# Altium PCB V_2.PcbDoc
Units mm, origin at the board's own origin, x right, y up, seen from the top; angles counter-clockwise.
Board outline 152.4 x 101.6 mm, 2 copper layers (Top Layer, Bottom Layer); 10 components, 0 nets, 82 pads, 64 vias.
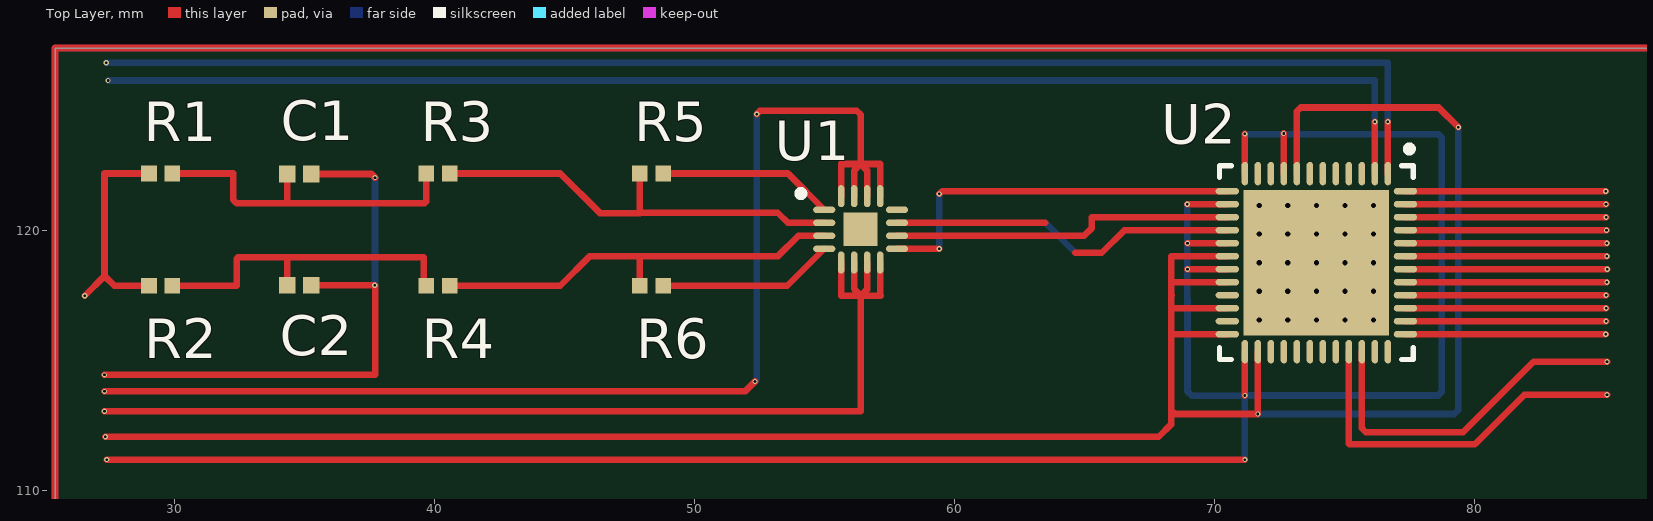
[diagram p0: Top Layer view]
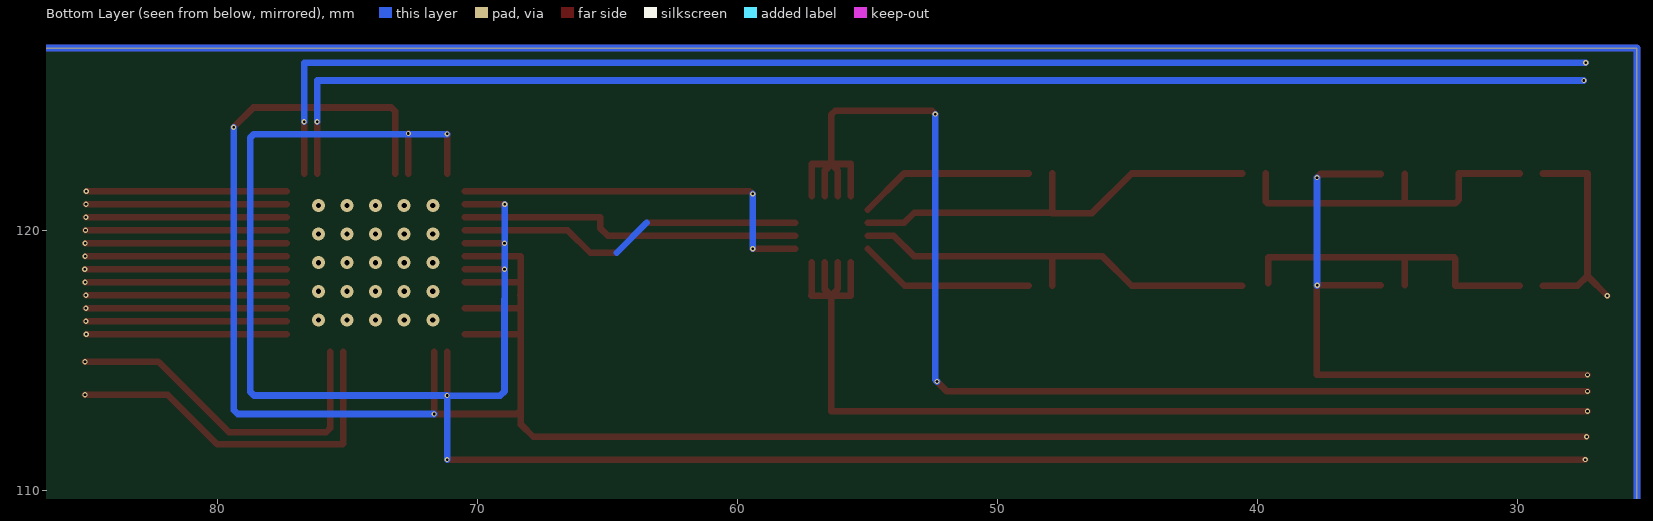
[diagram p1: Bottom Layer view, seen from below]

## Layer stack, top to bottom
Top Solder: solder mask 0.0102, Solder Resist, Dk 3.5
Top Layer: signal copper 0.0356
Dielectric 1: dielectric 0.32, FR-4, Dk 4.8
Bottom Layer: signal copper 0.0356
Bottom Solder: solder mask 0.0102, Solder Resist, Dk 3.5

## Board outline
25.4,25.4 177.8,25.4 177.8,127 25.4,127

## Design rules (kind name [scope] priority, off if disabled: settings)
Clearance [All] p1: gap=0.254 ignorepadtopadclearanceinfootprint=FALSE
PolygonConnect [All] p1: connectstyle=Relief reliefconductorwidth=0.254 reliefentries=4 polygonreliefangle="90 Angle" airgapwidth=0.254
RoutingVias [All] p1: holewidth=0.711 width=1.27 viastyle="Through Hole" minholewidth=0.711 minwidth=1.27 maxholewidth=0.711 maxwidth=1.27
SolderMaskExpansion [All] p1: expansion=0.102 istentingtop=FALSE
Width [All] p1: maxlimit=0.254 minlimit=0.254 preferedwidth=0.254
30 further rules are at their usual default settings.

## Components (designator, comment, footprint, x,y, rotation, side; value= is the part's Value field where it differs from the comment)
C1 "Comment" C 34.798,122.154 r0 top
C2 "Comment" C 34.798,117.876 r0 top
R1 "Comment" R 29.464,122.174 r0 top
R2 "Comment" R 29.464,117.856 r0 top
R3 "Comment" R 40.132,122.174 r0 top
R4 "Comment" R 40.132,117.856 r0 top
R5 "Comment" R 48.346,122.174 r0 top
R6 "Comment" R 48.346,117.856 r0 top
U1 "Comment" ADA 56.385,120.027 r0 top
U2 "Comment" ADC 73.914,118.745 r270 top

## Footprints (in the part's own frame and the unit in brackets; to place one, negate y for a bottom-side part, rotate by r counter-clockwise, add the part's x,y. Pads: shape width x height; smd on the part's side, far side on the other; paste and mask are expansions set on the pad)
ADA [mm] "QFN, 16-Leads, Body 3,00x2,75mm, Pitch 0,50mm, Thermal Pad 1,30x1,30mm, IPC Medium Density"
  oval 0.85x0.25 smd: 1(-1.4,0.75) 2(-1.4,0.25) 3(-1.4,-0.25) 4(-1.4,-0.75) 9(1.4,-0.75) 10(1.4,-0.25) 11(1.4,0.25) 12(1.4,0.75)
  oval 0.25x0.85 smd: 5(-0.75,-1.275) 6(-0.25,-1.275) 7(0.25,-1.275) 8(0.75,-1.275) 13(0.75,1.275) 14(0.25,1.275) 15(-0.25,1.275) 16(-0.75,1.275)
  rect 1.3x1.3 smd: 17(0,0)
  silkscreen extent -2.42,1.25 -2.17,1.5, body extent -1.5,-1.37 1.5,1.38, height 1
ADC [mm]
  oval 0.9x0.25 smd: 1(-3.425,2.75) 2(-3.425,2.25) 3(-3.425,1.75) 4(-3.425,1.25) 5(-3.425,0.75) 6(-3.425,0.25) 7(-3.425,-0.25) 8(-3.425,-0.75) 9(-3.425,-1.25) 10(-3.425,-1.75) 11(-3.425,-2.25) 12(-3.425,-2.75) 25(3.425,-2.75) 26(3.425,-2.25) 27(3.425,-1.75) 28(3.425,-1.25) 29(3.425,-0.75) 30(3.425,-0.25) 31(3.425,0.25) 32(3.425,0.75) 33(3.425,1.25) 34(3.425,1.75) 35(3.425,2.25) 36(3.425,2.75)
  oval 0.25x0.9 smd: 13(-2.75,-3.425) 14(-2.25,-3.425) 15(-1.75,-3.425) 16(-1.25,-3.425) 17(-0.75,-3.425) 18(-0.25,-3.425) 19(0.25,-3.425) 20(0.75,-3.425) 21(1.25,-3.425) 22(1.75,-3.425) 23(2.25,-3.425) 24(2.75,-3.425) 37(2.75,3.425) 38(2.25,3.425) 39(1.75,3.425) 40(1.25,3.425) 41(0.75,3.425) 42(0.25,3.425) 43(-0.25,3.425) 44(-0.75,3.425) 45(-1.25,3.425) 46(-1.75,3.425) 47(-2.25,3.425) 48(-2.75,3.425)
  rect 5.6x5.6 smd: 49(0,0)
  silkscreen extent -4.5,-3.73 3.73,3.72, body extent -3.57,-3.58 3.58,3.57, height 1
C [mm] "Chip Capacitor, 2-Leads, Body 1,00x0,50mm, IPC Medium Density"
  rect 0.64x0.64 smd: 1(-0.46,0) 2(0.46,0)
  body extent -0.55,-0.3 0.55,0.3, height 0.6
R [mm]
  rect 0.6x0.6 smd: 1(-0.45,0) 2(0.45,0)
  body extent -0.55,-0.3 0.55,0.3, height 0.6

## Via types
v1: diameter 0.2, hole 0.1, Top Layer to Bottom Layer, 39 vias
v2: diameter 0.5, hole 0.2, Top Layer to Bottom Layer, 25 vias

## Nets (pads, with @x,y where several pads share a name; then routed paths per layer and width w, separated by ;. In a path a pad name is that pad's centre, name@x,y a point inside that pad or via, vN(x,y) a via of type N, cw(c..) or ccw(c..) an arc to the next point about the centre after c; other vN are vias at no path point)
pads on no net: C1.1 C1.2 C2.1 C2.2 R1.1 R1.2 R2.1 R2.2 R3.1 R3.2 R4.1 R4.2 R5.1 R5.2 R6.1 R6.2 U1.1 U1.2 U1.3 U1.4 U1.5 U1.6 U1.7 U1.8 U1.9 U1.10 U1.11 U1.12 U1.13 U1.14 U1.15 U1.16 U1.17 U2.1 U2.2 U2.3 U2.4 U2.5 U2.6 U2.7 U2.8 U2.9 U2.10 U2.11 U2.12 U2.13 U2.14 U2.15 U2.16 U2.17 U2.18 U2.19 U2.20 U2.21 U2.22 U2.23 U2.24 U2.25 U2.26 U2.27 U2.28 U2.29 U2.30 U2.31 U2.32 U2.33 U2.34 U2.35 U2.36 U2.37 U2.38 U2.39 U2.40 U2.41 U2.42 U2.43 U2.44 U2.45 U2.46 U2.47 U2.48 U2.49
copper on no net: | length 640.3
  Top Layer w0.254: v1(26.543,117.475) 27.305,118.237 ; v1(27.305,113.03) 56.007,113.03 56.388,113.03 ; v1(27.305,113.792) 51.943,113.792 v1(52.324,114.173) ; v1(27.305,114.427) 37.719,114.427 37.719,117.856 v1(37.699,117.876) 35.258,117.876 ; v1(27.338,112.047) 67.851,112.047 68.326,112.522 68.326,113.072 ; v1(27.391,111.169) v1(71.164,111.169) ; 29.014,117.856 27.686,117.856 27.305,118.237 ; 29.014,122.174 27.305,122.174 27.305,118.237 ; 29.914,117.856 32.385,117.856 32.385,118.903 ; 29.914,122.174 32.258,122.174 32.258,121.158 32.385,121.031 34.417,121.031 ; 32.433,118.951 34.338,118.951 ; 34.338,117.876 34.338,118.951 ; 34.338,122.154 34.338,121.11 34.417,121.031 ; 35.258,122.154 37.572,122.154 v1(37.709,122.017) ; 39.576,117.962 39.576,118.951 34.338,118.951 ; 39.624,121.031 34.417,121.031 ; 39.682,121.089 39.682,122.174 ; 40.582,117.856 44.831,117.856 45.974,118.999 47.879,118.999 ; 40.582,122.174 44.831,122.174 46.355,120.65 47.879,120.65 47.896,120.667 ; 47.896,117.856 47.896,118.982 47.879,118.999 ; 47.896,122.174 47.896,120.667 ; 48.796,117.856 53.564,117.856 54.985,119.277 ; 48.796,122.174 53.588,122.174 54.985,120.777 ; v1(52.387,124.46) 52.514,124.587 56.239,124.587 56.388,124.438 56.388,122.54 ; 54.985,119.777 53.991,119.777 53.213,118.999 47.879,118.999 ; 54.985,120.277 53.586,120.277 53.196,120.667 47.896,120.667 ; 55.635,118.752 55.635,117.484 55.644,117.475 57.15,117.475 57.135,117.49 57.135,118.752 ; 55.635,121.302 55.635,122.546 55.644,122.555 ; 55.641,122.54 56.388,122.54 ; 56.135,118.752 56.135,117.737 56.397,117.475 ; 56.135,121.302 56.135,122.287 56.388,122.54 ; 56.635,118.752 56.635,117.713 56.397,117.475 ; 56.635,121.302 56.635,122.293 56.388,122.54 ; 57.135,121.302 57.135,122.54 56.388,122.54 ; 57.785,119.277 v1(59.412,119.277) ; 57.785,119.777 64.98,119.777 65.278,120.075 65.278,120.495 70.489,120.495 ; 57.785,120.277 63.492,120.277 ; v1(59.412,121.388) 59.436,121.412 59.519,121.495 70.489,121.495 ; 64.643,119.126 65.659,119.126 66.528,119.995 70.489,119.995 ; 68.334,117.51 68.349,117.495 ; 68.341,118.016 68.361,117.995 70.489,117.995 ; 68.354,116.995 70.489,116.995 ; 68.364,115.995 70.489,115.995 ; v1(68.947,120.995) 70.489,120.995 ; v1(68.957,118.495) 70.489,118.495 ; v1(68.958,119.495) 70.489,119.495 ; 70.489,118.995 68.326,118.995 68.326,113.072 ; v1(71.164,113.637) 71.164,115.32 ; 71.164,122.17 v1(71.164,123.698) ; 71.664,115.32 v1(71.664,112.923) 68.475,112.923 68.326,113.072 ; v1(72.654,123.712) 72.654,122.18 72.664,122.17 ; 73.164,122.17 73.164,124.565 73.313,124.714 78.613,124.714 v1(79.375,123.952) ; 75.164,115.32 75.164,111.78 75.184,111.76 80.01,111.76 81.915,113.665 v1(85.09,113.665) ; 75.664,115.32 75.664,112.923 75.664,112.373 75.813,112.225 79.558,112.225 82.268,114.935 v1(85.09,114.935) ; 76.164,122.17 v1(76.164,124.167) ; 76.664,122.17 v1(76.664,124.163) ; 77.339,115.995 v1(85.046,115.995) ; 77.339,116.495 v1(85.056,116.495) ; 77.339,116.995 v1(85.056,116.995) ; 77.339,117.495 v1(85.055,117.495) ; 77.339,117.995 v1(85.087,117.995) ; 77.339,118.495 v1(85.102,118.495) ; 77.339,118.995 v1(85.086,118.995) ; 77.339,119.495 v1(85.086,119.495) ; 77.339,119.995 v1(85.071,119.995) ; 77.339,120.495 v1(85.055,120.495) ; 77.339,120.995 v1(85.054,120.995) ; 77.339,121.495 v1(85.046,121.495) ; 56.388,113.03 56.397,113.039 ; 56.388,113.03 56.397,113.039 ; 56.397,113.039 56.397,117.475
  Bottom Layer w0.254: v1(27.375,126.435) 76.664,126.435 v1(76.664,124.163) ; v1(27.443,125.75) 76.164,125.75 v1(76.164,124.167) ; v1@37.709,117.866 v1(37.709,122.017) ; v1(52.324,114.173) 52.387,114.236 v1(52.387,124.46) ; v1(59.412,119.277) v1(59.412,121.388) ; 63.492,120.277 64.643,119.126 ; v1(68.947,120.995) 68.957,113.796 ; 68.961,113.792 69.126,113.627 v1@71.164,113.627 ; v1(71.164,111.169) v1(71.164,113.637) 78.591,113.637 78.74,113.786 78.74,123.539 78.591,123.688 v1@71.164,123.688 ; v1(71.664,112.923) 75.164,112.923 75.664,112.923 79.218,112.923 79.366,113.072 v1@79.366,123.943
  other v2: 71.714,116.545 72.814,116.545 73.914,116.545 75.014,116.545 76.114,116.545 71.714,117.645 72.814,117.645 73.914,117.645 75.014,117.645 76.114,117.645 71.714,118.745 72.814,118.745 73.914,118.745 75.014,118.745 76.114,118.745 71.714,119.845 72.814,119.845 73.914,119.845 75.014,119.845 76.114,119.845 71.714,120.945 72.814,120.945 73.914,120.945 75.014,120.945 76.114,120.945

## Other copper
Multi-Layer:
  lines w0.254: 25.399,107.061 95.376,107.061 95.376,127 25.399,127 25.399,107.061